# Altium PCB ESP32S3-9INCHES_DISPLAY.PcbDoc (part 1 of 2)
Units mil, origin at the board's own origin, x right, y up, seen from the top; angles counter-clockwise.
Board outline 3937 x 3937.01 mil, 2 copper layers (Top Layer, Bottom Layer); 92 components, 77 nets, 369 pads, 540 vias.
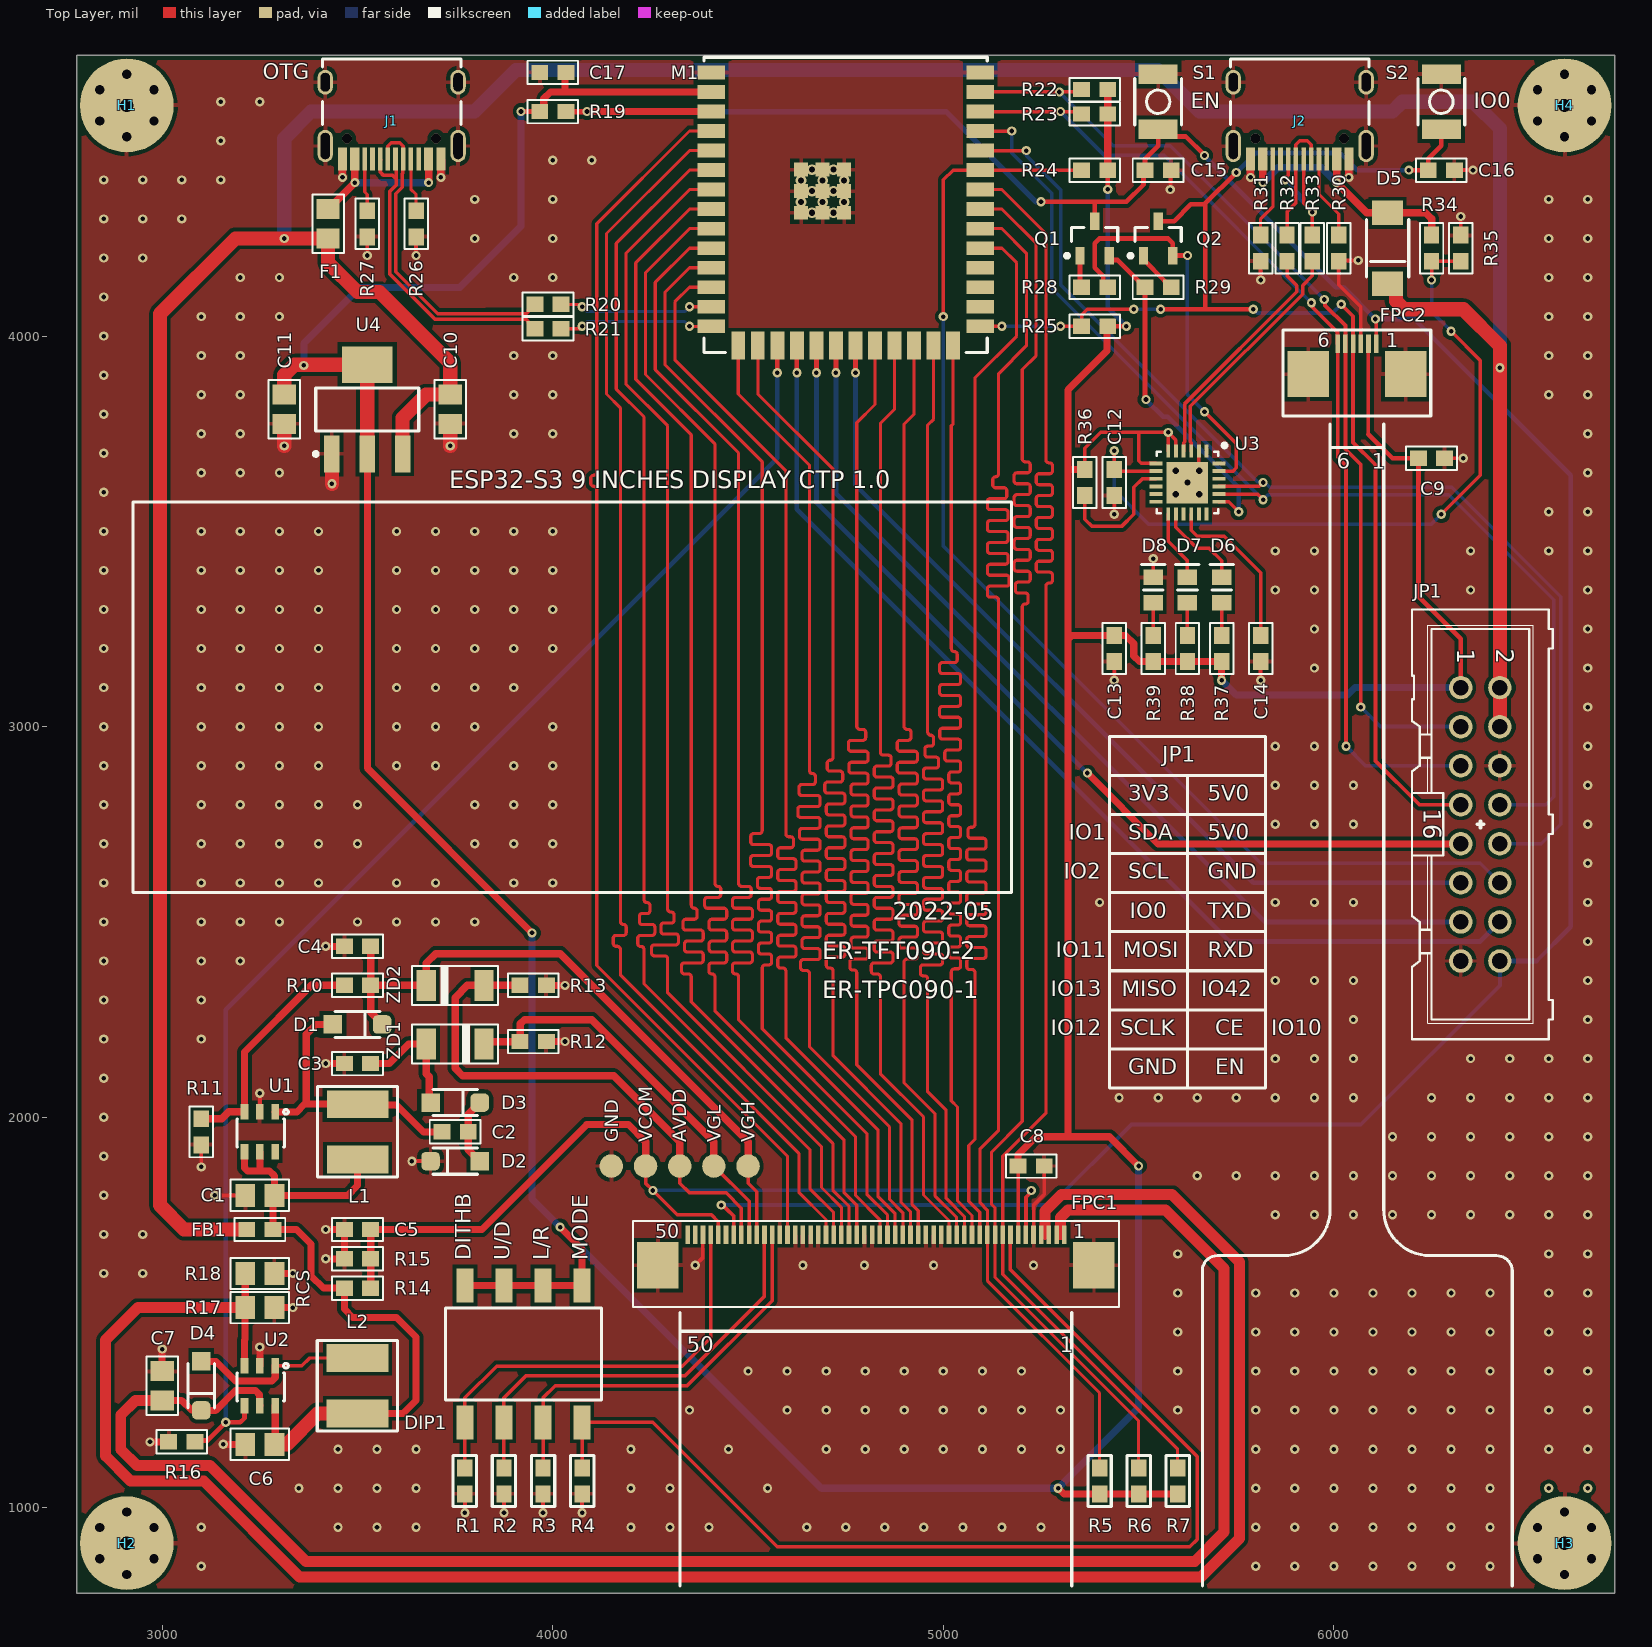
[diagram p0: Top Layer view]
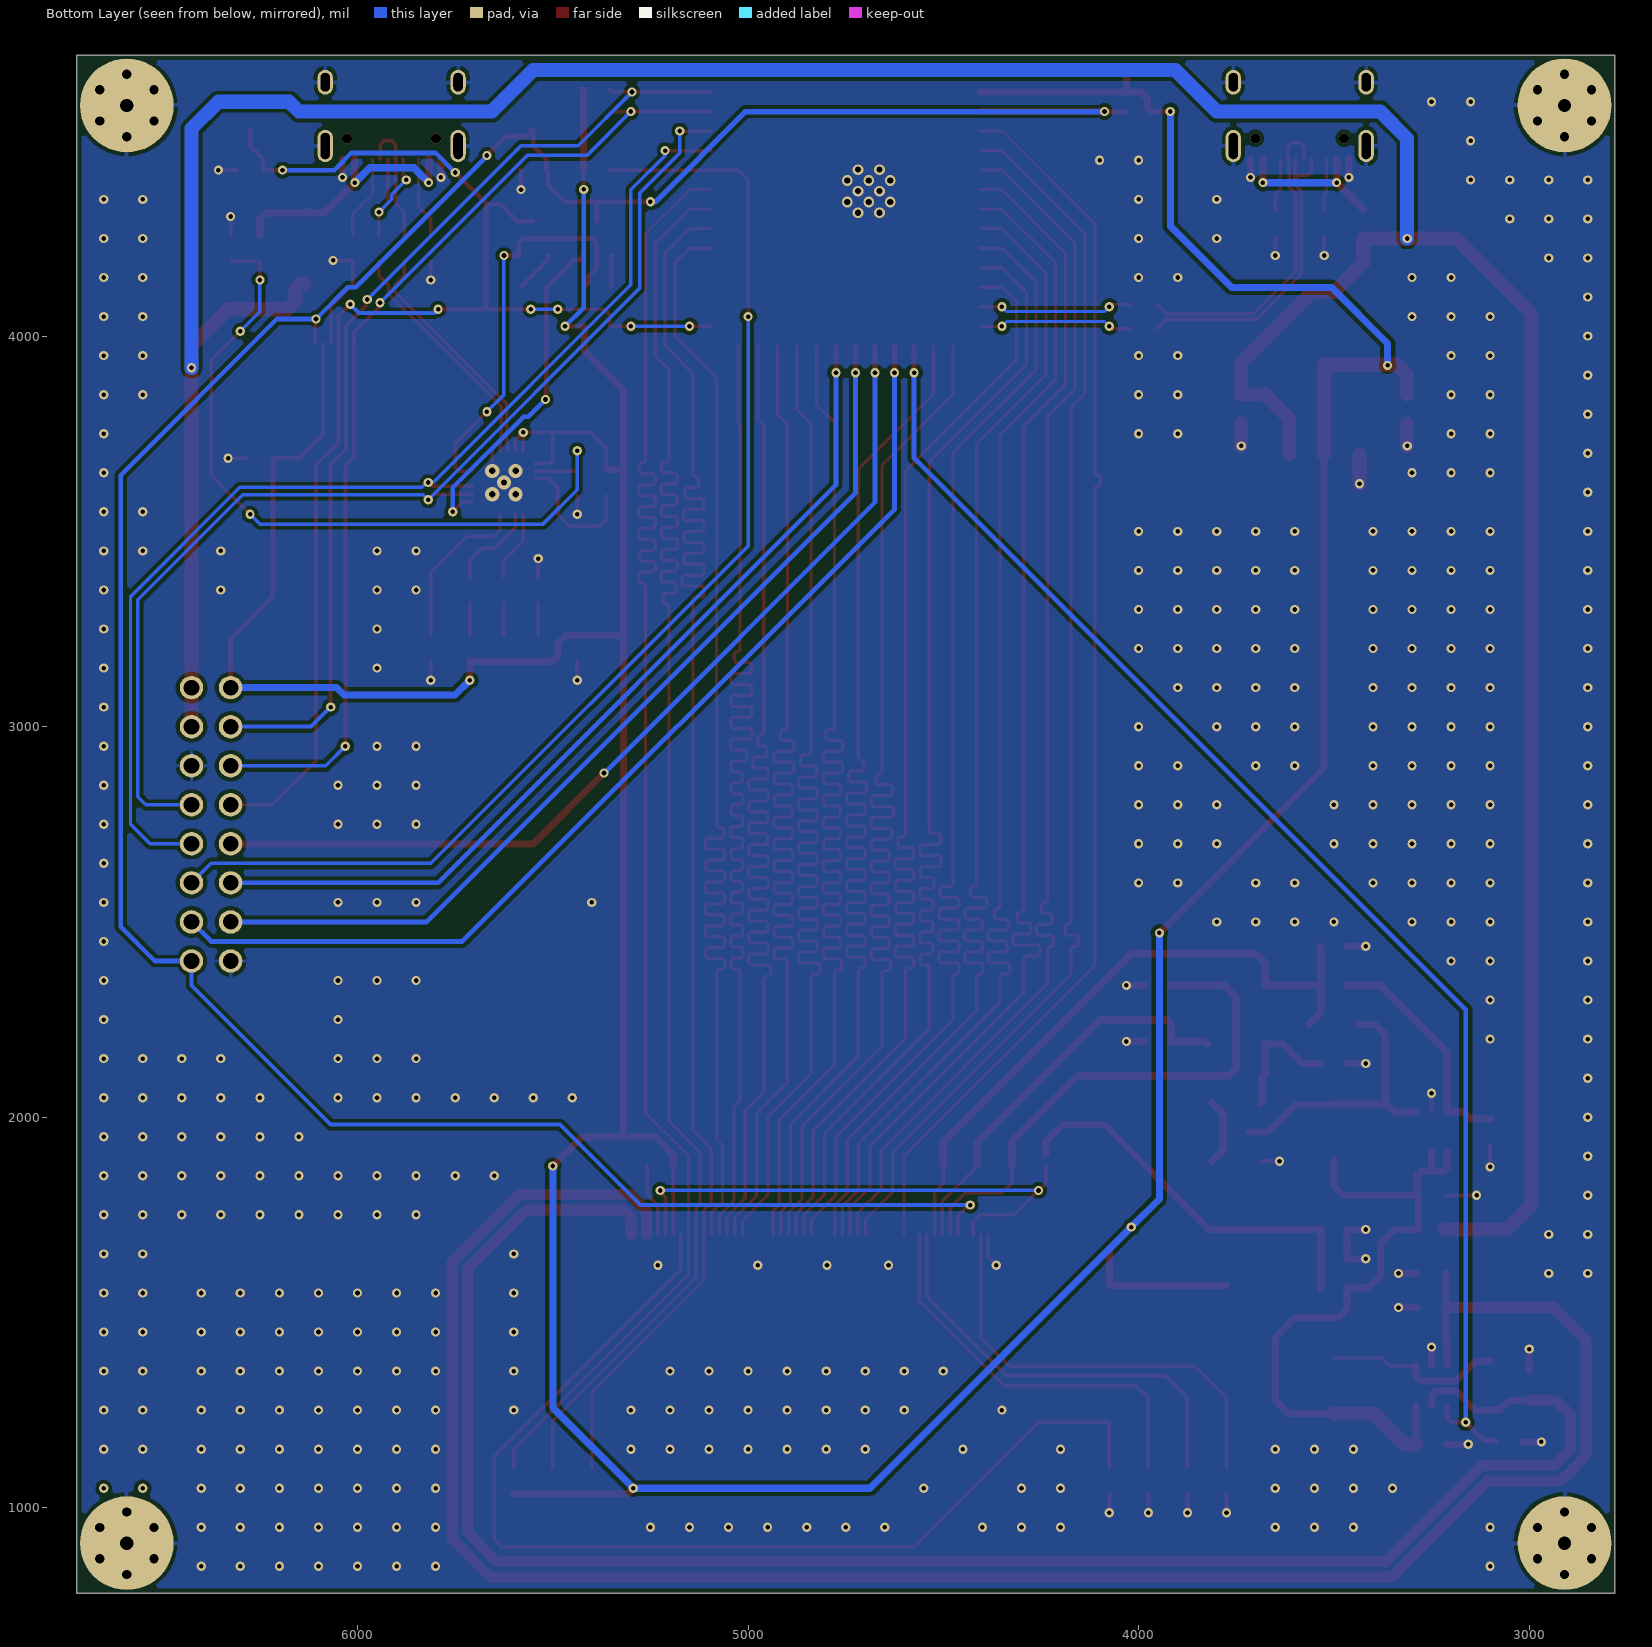
[diagram p1: Bottom Layer view, seen from below]

## Layer stack, top to bottom
Top Solder: solder mask 0.4, Solder Resist, Dk 3.5
Top Layer: signal copper 1.4
Dielectric 1: dielectric 12.6, FR-4, Dk 4.8
Bottom Layer: signal copper 1.4
Bottom Solder: solder mask 0.4, Solder Resist, Dk 3.5

## Board outline
2781.5,781.49 2781.5,4718.51 6718.51,4718.51 6718.51,781.49

## Design rules (kind name [scope] priority, off if disabled: settings)
Clearance [All] p1: gap=10 ignorepadtopadclearanceinfootprint=FALSE except(0: Arc-Hole Track-Hole SMDPad-Hole THPad-Hole Via-Hole Fill-Hole Poly-Hole Region-Hole Text-Hole; 6: Arc-Arc Arc-Track Track-Track; 7.8: Arc-SMDPad Track-SMDPad SMDPad-SMDPad)
DiffPairsRouting [All] p1: maxlimit=6 minlimit=6 mostfreqgap=6 toplayer_minwidth=8.91 toplayer_maxwidth=10.91 toplayer_prefwidth=10.91 bottomlayer_minwidth=8.91 bottomlayer_maxwidth=10.91 bottomlayer_prefwidth=10.91 maxuncoupledlength=500
PolygonConnect PolygonConnectGND [IsTrack Or IsVia] p1: connectstyle=Direct reliefconductorwidth=10 reliefentries=4 polygonreliefangle="90 Angle" airgapwidth=10
PolygonConnect [All] p2: connectstyle=Relief reliefconductorwidth=10 reliefentries=4 polygonreliefangle="90 Angle" airgapwidth=10
RoomDefinition ESP32S3-9INCHES_DISPLAY [InComponentClass('ESP32S3-9INCHES_DISPLAY')] p1: confinementstyle=ConfineOut formatcopy=TRUE lockcomponents=FALSE outline 0,0 500,0 500,500 0,500
RoutingVias [All] p1: holewidth=28 width=50 viastyle="Through Hole" minholewidth=11 minwidth=23 maxholewidth=100 maxwidth=120
SolderMaskExpansion [All] p1: expansion=4 istentingtop=FALSE
Width [All] p1: maxlimit=120 minlimit=6 preferedwidth=10 minimp=50.000000 maximp=50.000000 favimp=50.000000
29 further rules are at their usual default settings.

## Classes and differential pairs
differential pair USB1: +USB1_P -USB1_N
differential pair USBD: +USBD_P -USBD_N

## Components (designator, comment, footprint, x,y, rotation, side; value= is the part's Value field where it differs from the comment)
AVDD "Test Point" MICRO-FIDUCIAL 4325,1875 r90 top
C1 "22uF" 2012[0805] 3250,1800 r0 top
C2 "0.1uF" 1608[0603] 3750,1962.5 r0 top
C3 "1uF" 1608[0603] 3500,2137.5 r0 top
C4 "1uF" 1608[0603] 3500,2437.5 r0 top
C5 "0.1uF" 1608[0603] 3500,1712.5 r0 top
C6 "22uF" 2012[0805] 3250,1162.5 r0 top
C7 "10uF" 2012[0805] 3000,1312.5 r270 top
C8 "0.1uF" 1608[0603] 5225,1875 r180 top
C9 "0.1uF" 1608[0603] 6250,3687.5 r180 top
C10 "10uF" 2012[0805] 3737.5,3812.5 r90 top
C11 "10uF" 2012[0805] 3312.5,3812.5 r90 top
C12 "0.1uF" 1608[0603] 5437.5,3625 r90 top
C13 "4.7uF" 1608[0603] 5437.5,3200 r90 top
C14 "4.7uF" 1608[0603] 5812.5,3200 r90 top
C15 "0.1uF" 1608[0603] 5550,4425 r180 top
C16 "0.1uF" 1608[0603] 6275,4425 r180 top
C17 "0.1uF" 1608[0603] 4000,4675 r0 top
D1 "1N5819W" SOD123FL 3500,2237.5 r0 top
D2 "1N5819W" SOD123FL 3750,1887.5 r180 top
D3 "1N5819W" SOD123FL 3750,2037.5 r0 top
D4 "1N5819W" SOD123FL 3100,1312.5 r270 top
D5 "RB056LAM-40TR" SOD128 6137.5,4225 r270 top
D6 "LED" LED_0603_RED 5712.5,3350 r90 top
D7 "LED" LED_0603_YELLOW 5625,3350 r90 top
D8 "LED" LED_0603_YELLOW 5537.5,3350 r90 top
DIP1 "DSMIC04G-BK-TUBE" DSMIC04G-BK 3925,1393.75 r0 top
F1 "SMD0805-100" 2012[0805] 3425,4287.5 r90 top
FB1 "MPZ2012S101AT" 1608[0603] 3250,1712.5 r180 top
FPC1 "JUSHUO AFC07-S50ECC-00" 68715014022 4827.41,1660 r0 top
FPC2 "JUSHUO AFC07-S06FCA-00" 68710614522 6058.95,3941.52 r0 top
GND "Test Point" MICRO-FIDUCIAL 4150,1875 r90 top
H1 "NUT" "Nut-M3-5 SMT" 2909.45,4590.55 r0 top
H2 "NUT" "Nut-M3-5 SMT" 2909.45,909.45 r0 top
H3 "NUT" "Nut-M3-5 SMT" 6590.55,909.45 r0 top
H4 "NUT" "Nut-M3-5 SMT" 6590.55,4590.55 r0 top
J1 "USB 3.1 C" USB-C-16P 3587.5,4650 r180 top
J2 "USB 3.1 C" USB-C-16P 5912.5,4650 r180 top
JP1 "08x2IDC-H9" 2X08 6375,2750 r270 top
L1 "10uH" INDUCTOR_5X5MM_NR5040_NOTHERMALS 3500.32,1962.5 r90 top value=10mH
L2 "10uH" INDUCTOR_5X5MM_NR5040_NOTHERMALS 3500,1312.5 r90 top value=10mH
M1 "ESP32-S3-WROOM-2" ESP32-S3-WROOM-1 4750,4475 r0 top
Q1 "MMBT2222ALT1G" SOT23N-NPN 5387.5,4250 r90 top
Q2 "MMBT2222ALT1G" SOT23N-NPN 5550,4250 r90 top
R1 "10K" 1608[0603] 3775,1068.75 r90 top
R2 "10K" 1608[0603] 3875,1068.75 r90 top
R3 "10K" 1608[0603] 3975,1068.75 r90 top
R4 "10K" 1608[0603] 4075,1068.75 r90 top
R5 "10K" 1608[0603] 5400,1068.75 r270 top
R6 "10K" 1608[0603] 5500,1068.75 r270 top
R7 "10K" 1608[0603] 5600,1068.75 r270 top
R10 "82K" 1608[0603] 3500,2337.5 r180 top
R11 "4.3K" 1608[0603] 3100,1962.5 r270 top
R12 "10K" 1608[0603] 3950,2193.75 r0 top
R13 "10K" 1608[0603] 3950,2337.5 r0 top
R14 "150" 1608[0603] 3500,1562.5 r0 top
R15 "1.2K" 1608[0603] 3500,1637.5 r180 top
R16 "47K" 1608[0603] 3050,1168.75 r0 top
R17 "1R" 2012[0805] 3250,1512.5 r180 top
R18 "10R" 2012[0805] 3250,1600 r180 top
R19 "10K" 1608[0603] 4000,4575 r180 top
R20 "22" 1608[0603] 3987.5,4081.25 r180 top
R21 "22" 1608[0603] 3987.5,4018.75 r180 top
R22 "10K" 1608[0603] 5387.5,4631.25 r180 top
R23 "10K" 1608[0603] 5387.5,4568.75 r180 top
R24 "10K" 1608[0603] 5387.5,4425 r180 top
R25 "10K" 1608[0603] 5387.5,4025 r180 top
R26 "5.1K" 1608[0603] 3650,4287.5 r90 top
R27 "5.1K" 1608[0603] 3525,4287.5 r270 top
R28 "10K" 1608[0603] 5387.5,4125 r180 top
R29 "10K" 1608[0603] 5550,4125 r0 top
R30 "5.1K" 1608[0603] 6012.5,4225 r90 top
R31 "5.1K" 1608[0603] 5812.5,4225 r270 top
R32 "22" 1608[0603] 5880,4225 r270 top
R33 "22" 1608[0603] 5945,4225 r270 top
R34 "22.1K" 1608[0603] 6250,4225 r270 top
R35 "47.5K" 1608[0603] 6325,4225 r270 top
R36 "4.7K" 1608[0603] 5362.5,3625 r90 top
R37 "1K" 1608[0603] 5712.5,3200 r270 top
R38 "1K" 1608[0603] 5625,3200 r270 top
R39 "1K" 1608[0603] 5537.5,3200 r270 top
S1 "B3U-1000P" SW2-SMD-3.0X2.5X1.2+0.4MM 5550,4600 r90 top
S2 "B3U-1000P" SW2-SMD-3.0X2.5X1.2+0.4MM 6275,4600 r90 top
U1 "MT3608" SOT23-6 3250,1962.5 r270 top
U2 "MT9284BS6" SOT23-6 3250,1312.5 r270 top
U3 "CP2102N" QFN24_4X4 5625,3625 r270 top value=Value
U4 "TLV1117LV33" MP04A_N 3525,3812.5 r90 top
VCOM "Test Point" MICRO-FIDUCIAL 4237.5,1875 r90 top
VGH "Test Point" MICRO-FIDUCIAL 4500,1875 r90 top
VGL "Test Point" MICRO-FIDUCIAL 4412.5,1875 r90 top
ZD1 "12.0V" SOD80 3750,2187.5 r180 top
ZD2 "6.25V" SOD80 3750,2337.5 r0 top

## Footprints (in the part's own frame and the unit in brackets; to place one, negate y for a bottom-side part, rotate by r counter-clockwise, add the part's x,y. Pads: shape width x height; smd on the part's side, far side on the other; paste and mask are expansions set on the pad)
2X08 [mil] "2X08"
  round 60 hole 40: 1(-350,-50) 2(-350,50) 3(-250,-50) 4(-250,50) 5(-150,-50) 6(-150,50) 7(-50,-50) 8(-50,50) 9(50,-50) 10(50,50) 11(150,-50) 12(150,50) 13(250,-50) 14(250,50) 15(350,-50) 16(350,50)
  silkscreen extent -550,-175 550,185, body extent -475,-179 475,190, height 365
1608[0603] [mm] "Chip Resistor; Body 1.6 x 0.8 mm (LxW typ)"
  rect 1.1x1 smd: 1(-0.85,0) 2(0.85,0)
  silkscreen extent -1.65,-0.76 1.65,0.76, body extent -0.87,-0.48 0.87,0.48, height 0.85
2012[0805] [mm] "Chip Resistor; Body 2.0 x 1.3 mm (LxW typ)"
  rect 1.3x1.5 smd: 1(-0.95,0) 2(0.95,0)
  silkscreen extent -1.91,-1.02 1.91,1.02, body extent -1.07,-0.7 1.07,0.7, height 0.7
68710614522 [mm] "06 pins"
  rect 0.3x1.2 smd: 1(1.25,0.99) 2(0.75,0.99) 3(0.25,0.99) 4(-0.25,0.99) 5(-0.75,0.99) 6(-1.25,0.99)
  rect 2.7x3 smd: Z1(3.18,-0.99) Z2(-3.18,-0.99)
  silkscreen extent -4.8,-3.71 4.8,1.89, body extent -4.7,-3.71 4.7,1.39, height 2.06
68715014022 [mm] "50 pins"
  rect 0.3x1.2 smd: 1(12.25,0.99) 2(11.75,0.99) 3(11.25,0.99) 4(10.75,0.99) 5(10.25,0.99) 6(9.75,0.99) 7(9.25,0.99) 8(8.75,0.99) 9(8.25,0.99) 10(7.75,0.99) 11(7.25,0.99) 12(6.75,0.99) 13(6.25,0.99) 14(5.75,0.99) 15(5.25,0.99) 16(4.75,0.99) 17(4.25,0.99) 18(3.75,0.99) 19(3.25,0.99) 20(2.75,0.99) 21(2.25,0.99) 22(1.75,0.99) 23(1.25,0.99) 24(0.75,0.99) 25(0.25,0.99) 26(-0.25,0.99) 27(-0.75,0.99) 28(-1.25,0.99) 29(-1.75,0.99) 30(-2.25,0.99) 31(-2.75,0.99) 32(-3.25,0.99) 33(-3.75,0.99) 34(-4.25,0.99) 35(-4.75,0.99) 36(-5.25,0.99) 37(-5.75,0.99) 38(-6.25,0.99) 39(-6.75,0.99) 40(-7.25,0.99) 41(-7.75,0.99) 42(-8.25,0.99) 43(-8.75,0.99) 44(-9.25,0.99) 45(-9.75,0.99) 46(-10.25,0.99) 47(-10.75,0.99) 48(-11.25,0.99) 49(-11.75,0.99) 50(-12.25,0.99)
  rect 2.7x3 smd: Z1(14.18,-0.99) Z2(-14.18,-0.99)
  silkscreen extent -15.8,-3.71 15.8,1.89, body extent -15.7,-3.71 15.7,1.39, height 2.06
DSMIC04G-BK [mm] "Dip Switch SPST SMT Type,4 Position,Pitch 2.54mm."
  rect 1.1x2.2 smd: 1(-3.81,-4.445) 2(-1.27,-4.445) 3(1.27,-4.445) 4(3.81,-4.445) 5(3.81,4.445) 6(1.27,4.445) 7(-1.27,4.445) 8(-3.81,4.445)
  silkscreen extent -5.08,-3 5.08,3, body extent -5.55,-4.9 5.55,4.9, height 4.36
ESP32-S3-WROOM-1 [mm] "ESP32-S3-WROOM-1[U]"
  rect 1.8x0.9 smd: 1(-8.75,5.08) 2(-8.75,3.81) 3(-8.75,2.54) 4(-8.75,1.27) 5(-8.75,0) 6(-8.75,-1.27) 7(-8.75,-2.54) 8(-8.75,-3.81) 9(-8.75,-5.08) 10(-8.75,-6.35) 11(-8.75,-7.62) 12(-8.75,-8.89) 13(-8.75,-10.16) 14(-8.75,-11.43) 27(8.75,-11.43) 28(8.75,-10.16) 29(8.75,-8.89) 30(8.75,-7.62) 31(8.75,-6.35) 32(8.75,-5.08) 33(8.75,-3.81) 34(8.75,-2.54) 35(8.75,-1.27) 36(8.75,0) 37(8.75,1.27) 38(8.75,2.54) 39(8.75,3.81) 40(8.75,5.08)
  rect 0.9x1.8 smd: 15(-6.985,-12.68) 16(-5.715,-12.68) 17(-4.445,-12.68) 18(-3.175,-12.68) 19(-1.905,-12.68) 20(-0.635,-12.68) 21(0.635,-12.68) 22(1.905,-12.68) 23(3.175,-12.68) 24(4.445,-12.68) 25(5.715,-12.68) 26(6.985,-12.68)
  rect 0.9x0.9 smd: 41(-2.9,-4.04) 41(-2.9,-2.64) 41(-2.9,-1.24) 41(-1.5,-4.04) 41(-1.5,-2.64) 41(-1.5,-1.24) 41(-0.1,-4.04) 41(-0.1,-2.64) 41(-0.1,-1.24)
  silkscreen extent -9.2,-13.13 9.2,6.07, body extent -9.01,-12.93 9.01,12.57, height 3.11
INDUCTOR_5X5MM_NR5040_NOTHERMALS [mil] "INDUCTOR_5X5MM_NR5040_NOTHERMALS"
  rect 71x158 smd: 1(-70.87,0) 2(71,0)
  silkscreen extent -116,-102 116,103, body extent -98,-98 99,100, height 60
LED_0603_RED [mil]
  rect 40x50 smd: 1(-32.5,0) 2(32.5,0)
  silkscreen extent 0,-30 65,30, body extent -32,-16 32,16, height 26
LED_0603_YELLOW [mil]
  rect 40x50 smd: 1(-32.5,0) 2(32.5,0)
  silkscreen extent 0,-30 65,30, body extent -31,-16 32,16, height 26
MICRO-FIDUCIAL [mil] "MICRO-FIDUCIAL"
  rrect100% 60x60 smd: 1(0,0)
MP04A_N [mm] "SOT223, 4-Leads, Body 6.5x3.5mm, Pitch 2.3mm, Lead Span 7mm, IPC Medium Density"
  rect 2.4x1 smd: 1(-2.9,2.3) 2(-2.9,0) 3(-2.9,-2.3)
  rect 2.4x3.3 smd: 4(2.9,0)
  silkscreen extent -3.02,-3.35 1.4,3.47, body extent -1.85,-3.35 1.85,3.35, height 1.8
"Nut-M3-5 SMT" [mil] "M3 latï¿½n standoff spacer 5 mm."
  round 240 hole 34 mask+4: 0(0,0)
  body extent -118,-118 118,118, height 201
QFN24_4X4 [mm]
  rect 0.85x0.25 smd mask+0.127: 1(-2.05,1.25) 2(-2.05,0.75) 3(-2.05,0.25) 4(-2.05,-0.25) 5(-2.05,-0.75) 6(-2.05,-1.25) 13(2.05,-1.25) 14(2.05,-0.75) 15(2.05,-0.25) 16(2.05,0.25) 17(2.05,0.75) 18(2.05,1.25)
  rect 0.25x0.85 smd mask+0.127: 7(-1.25,-2.05) 8(-0.75,-2.05) 9(-0.25,-2.05) 10(0.25,-2.05) 11(0.75,-2.05) 12(1.25,-2.05) 19(1.25,2.05) 20(0.75,2.05) 21(0.25,2.05) 22(-0.25,2.05) 23(-0.75,2.05) 24(-1.25,2.05)
  rect 2.7x2.7 smd mask+0.102: 25(0,0)
  silkscreen extent -2.54,-1.99 1.99,2.54, body extent -2,-2 1.99,2, height 1.8
SOD80 [mm]
  rect 1.25x2 smd: 1(1.875,0) 2(-1.875,0)
  silkscreen extent -2.79,-1.27 2.79,1.27, body extent -1.85,-0.8 1.85,0.8, height 1.57
SOD123FL [mm] "SOD-123; 2 Leads; Body 2.7 x 1.6 mm, (LxW)"
  rect 1.2x1.2 smd: 1(-1.6,0)
  rrect50% 1.2x1.2 smd: 2(1.6,0)
  silkscreen extent -1.45,-0.85 1.45,0.85, body extent -1.45,-0.85 1.45,0.85, height 0.73
SOD128 [mm] "SOD-128; 2 Leads; Body 3.7 x 2.5 mm, (LxW)"
  rect 1.6x2 smd: 1(-2.3,0) 2(2.3,0)
  silkscreen extent -1.88,-1.38 1.88,1.38, body extent -1.85,-1.25 1.85,1.25, height 0.73
SOT23-6 [mm]
  rect 1x0.5 smd: 1(-1.3,1) 2(-1.3,0) 3(-1.3,-1) 4(1.3,-1) 5(1.3,0) 6(1.3,1)
  silkscreen extent -1.45,-1.5 0.97,1.85, body extent -1.5,-1.52 1.5,1.48, height 1.3
SOT23N-NPN [mm] "SOT23, 3-Leads, Body 2.9x1.3mm, Pitch 0.95mm, Lead Span 2.3mm, IPC Medium Density"
  rect 1.15x0.6 smd: 1(-1.125,0.95) 2(-1.125,-0.95) 3(1.125,0)
  silkscreen extent -1.25,-1.5 0.7,1.92, body extent -0.7,-1.5 0.7,1.5, height 1.12
SW2-SMD-3.0X2.5X1.2+0.4MM [mil] "SW2-SMD-3.0X2.5X1.2+0.4MM"
  rect 50x100 smd: 1(-70,0) 2(70,0)
  silkscreen extent -60,-60 60,60
USB-C-16P [mm] "USB 3.1 Type C Female"
  rect 0.3x1.5 smd: A1(-3.35,5.002) A4(-2.55,5.002) A5(-1.25,5.002) A6(-0.25,5.002) A7(0.25,5.002) A8(1.25,5.002) A9(2.55,5.002) A12(3.35,5.002) B1(3.05,5.002) B4(2.25,5.002) B5(1.75,5.002) B6(0.75,5.002) B7(-0.75,5.002) B8(-1.75,5.002) B9(-2.25,5.002) B12(-3.05,5.002)
  oval 1x1.6 hole 0.6 slot 1.2 at 90 deg: S1(-4.32,0) S2(4.32,0)
  oval 1x2.1 hole 0.6 slot 1.7 at 90 deg: S3(4.32,4.15) S4(-4.32,4.15)
  silkscreen extent -4.5,-1.5 4.5,2.75, body extent -4.48,-2.6 4.47,5.3, height 3.16

## Part data
AVDD GND VCOM VGH VGL: "Fiducial Alignment PointsVarious fiducial points for machine vision alignment."
C1 C2 C3 C4 C5 C6 C7 C8 C9 C10 C11 C12 C13 C14 C15 C16 C17: library part Cap, "Capacitor"
D1 D2 D3 D4: "40V 1A 600mV @ 1A SOD-123F Schottky Barrier Diodes (SBD) RoHS"
D5: library part Diode, "Default Diode"
D6 D7 D8: "Typical INFRARED GaAs LED", LatestRevisionDate=08-Jul-2005, LatestRevisionNote="Mech Layer 1 removed.", PackageReference=LED-0, Published=8-Jun-2000, Publisher="Altium Limited"
DIP1: library part "DIP SWITCH 4 POS", "Dip Switch SPST SMT Type,4 Position,Pitch 2.54mm.", ES P/N=0007-1436-4, Link=https://www.es.co.th/detail.asp?Prod=000714364, Product P/N=DSMIC04G-BK-TUBE
F1: library part MPZ2012S101AT, "Ferrite Beads & Chip for EMI", Code_IPC=RESC2012, LatestRevisionDate=29-May-2009, LatestRevisionNote="IPC-7351 Footprint Added.", PackageDescription="Chip Resistor 0805 Case Size", PackageReference=6-0805, PackageVersion=Mar-2003, Published=24-Mar-1999, Publisher="Altium Limited"
FB1: library part MMZ1608B301C, "MMZ1608B301C", Code_IPC=RESC2012, LatestRevisionDate=29-May-2009, LatestRevisionNote="IPC-7351 Footprint Added.", PackageDescription="Chip Resistor 0805 Case Size", PackageReference=6-0805, PackageVersion=Mar-2003, Published=24-Mar-1999, Publisher="Altium Limited"
FPC1: library part "WE-ZIF Connector WR-FPC 68715014022", "WR-FPC 0.50mm SMT ZIF Horizontal Top Contact", Manufacturer="Wจนrth Elektronik eiSos GmbH", partNo=68715014022, ComponentLink1 Description=Manufacturer, ComponentLink1URL=http://www.we-online.com, ComponentLink2 Description=Datasheet, ComponentLink2URL=http://katalog.we-online.de/em/datasheet/6871xx14022.pdf, Created by="Karrer Zheng", Created Date="21 October 2013", NoPins=50
FPC2: library part "WE-ZIF Connector WR-FPC 68710614522", "WR-FPC 0.50mm SMT ZIF Horizontal Bottom Contact", Manufacturer="W¨¹rth Elektronik eiSos GmbH", partNo=68710614522, ComponentLink1 Description=Manufacturer, ComponentLink1URL=http://www.we-online.com, ComponentLink2 Description=Datasheet, ComponentLink2URL=http://katalog.we-online.de/em/datasheet/6871xx14522.pdf, Created by="Karrer Zheng", Created Date="28 October 2013", NoPins=06
H1 H2 H3 H4: library part Nut, "Hold"
J1 J2: library part USB-3.1-Type-C, "USB 3.1 Type C"
JP1: library part PINHD-2X08IDC, "IDC Header 16 Pins Male"
L1 L2: library part Inductor, "Inductor", Code_IEC=1005, Code_JEITA=0402, LatestRevisionDate=29-May-2009, LatestRevisionNote="IPC-7351 Footprint Added.", PackageDescription="Chip Inductor", PackageReference=0402-A, Published=8-Jun-2000, Publisher="Altium Limited"
Q1 Q2: "Transistor NPN 40V/0.6A,General purpose", Code_JEDEC=TO-226-AA, LatestRevisionDate=17-Jul-2002, LatestRevisionNote="Re-released for DXP Platform.", PackageDescription="TO, Flat Index; 3 In-Line, Axial Leads; Body Dia. 4.8mm; Leads 0.55 x 0.51 mm (max)", PackageReference=TO-226-AA, Published=8-Jun-2000, Publisher="Altium Limited"
R1 R2 R3 R4 R5 R6 R7 R10 R11 R12 R13 R14 R15 R16 R17 R18 R19 R20 R21 R22 R23 R24 R25 R26 R27 R28 R29 R30 R31 R32 R33 R34 R35 R36 R37 R38 R39: library part Res, "Resistor"
  R1 R2 R3 R4 R5 R6 R7 R10 R11 R12 R13 R14 R15 R16 R17 R18 R19 R20 R21 R22 R23 R24 R25 R26 R27 R28 R29 R30 R31 R32 R33 R34 R35: Code_IPC=RESC2012, LatestRevisionDate=29-May-2009, LatestRevisionNote="IPC-7351 Footprint Added.", PackageDescription="Chip Resistor 0805 Case Size", PackageReference=6-0805, PackageVersion=Mar-2003, Published=24-Mar-1999, Publisher="Altium Limited"
S1 S2: library part "Tact SW", "SMD-BUTTON-WITHOUT-BOSS-(2P-3X2.5MM)"
U1: "Step-Up Positive Adjustable 1 1.2MHz SOT-23-6 DC-DC Converters RoHS"
U2: library part MT9284, "SOT-23-6 LED Drivers RoHS"
U3: "SINGLE-CHIP USB-TO-UART BRIDGE", RefDes=RefDes, Type=Type
U4: library part LD1117AS33TR, "1000mA Low-Dropout Linear Regulator, 4-pin SOT-223", Manufacturer="National Semiconductor", PackageTopMarking=XYTT*N05B, PartNumber=LM1117IMP-3.3, PowerWise=N, Supplier Part Number 1=7614123, Code_IPC=SOT223-4, Code_JEDEC=TO-261-AA, ComponentLink1Description="LM1117 Datasheet", ComponentLink1URL=http://www.national.com/ds/LM/LM1117.pdf, ComponentLink2Description="LM1117 Web Page", ComponentLink2URL=http://www.national.com/pf/LM/LM1117.html, ComponentLink3Description="MP04A Package Page", ComponentLink3URL=http://www.national.com/packaging/folders/mp04a.html, CompType="LDO IC", DatasheetVersion=Apr-2006, PackageDescription="Molded SOT-223, 6.50 x 3.56 x 1.6mm Body, 4 Lead, 2.3mm Pitch", PackageReference=MP04A, PackageVersion="revB, Apr-2003", PinCount=4, Published=4-Dec-2008, Publisher="Altium Limited", RoHS=N, Supplier 1=Farnell
ZD1 ZD2: library part Zener, "Zener Diode"

## Via types
v1: diameter 23.62, hole 11.81, Top Layer to Bottom Layer, tented both sides, 487 vias
v2: diameter 39.37, hole 23.62, Top Layer to Bottom Layer, 24 vias
v3: diameter 27.56, hole 15.75, Top Layer to Bottom Layer, tented bottom, 12 vias
v4: diameter 23, hole 11.81, Top Layer to Bottom Layer, tented both sides, 8 vias
v5: diameter 36, hole 16, Top Layer to Bottom Layer, tented both sides, 5 vias
v6: diameter 25.59, hole 25.59, Top Layer to Bottom Layer, 4 vias

## Nets (pads, with @x,y where several pads share a name; then routed paths per layer and width w, separated by ;. In a path a pad name is that pad's centre, name@x,y a point inside that pad or via, vN(x,y) a via of type N, cw(c..) or ccw(c..) an arc to the next point about the centre after c; other vN are vias at no path point)
3V3P: C8.2 C9.2 C11.2 C13.2 C17.2 DIP1.5 DIP1.6 DIP1.7 DIP1.8 FPC1.7 FPC2.2 JP1.1 M1.2 R5.2 R6.2 R7.2 R19.2 R22.1 R23.1 R24.1 R25.1 R36.2 R37.2 R38.2 R39.2 U3.5 U3.6 U3.7 U4.2 U4.4 | length 13588.6
  Top Layer w8.91: C8.2@5191.54,1875 5191.58,1874.96 FPC1.7@5191.58,1698.97 ; 5318.75,3656.25 5320.96,3658.46 ; R36.2@5362.5,3658.46 5362.5,3712.5 5403.49,3753.49 5500,3753.49 ; U3.7@5544.29,3674.21 5507.04,3674.21 5500,3681.25 5500,3753.49 ; U3.5@5595.47,3705.71 5595.47,3733.81 v1(5575.79,3753.49) 5500,3753.49
  Top Layer w9: 6088.47,3749.03 FPC2.2@6088.47,3980.49
  Top Layer w10: U3.6@5575.79,3705.71 v1(5575.79,3753.49)
  Top Layer w12: v1(3918.75,4575) R19.2@3966.54,4575 ; R25.1@5418.75,4022.79 R25.1@5420.96,4025 v1(5468.75,4025) ; v1(5420.96,4375.54) R24.1@5420.96,4425 ; 6088.47,3749.03 6150,3687.5 C9.2@6216.54,3687.5 6216.54,3333.46 6325,3225 JP1.1@6325,3100
  Top Layer w18: U4.2@3525,3698.33 3525,2893.75 v1(3946.88,2471.88) ; DIP1.8@3775,1568.75 DIP1.7@3875,1568.75 DIP1.6@3975,1568.75 DIP1.5@4075,1568.75 4075,1662.5 v1(4018.75,1718.75) ; R19.2@3966.54,4575 3976.9,4585.37 3976.9,4608.15 3993.75,4625 4031.25,4625 ; C17.2@4033.46,4675 4031.25,4672.79 4031.25,4625 ; M1.2@4405.51,4625 4031.25,4625 ; C8.2@5191.54,1875 5191.54,1904.04 5237.5,1950 5318.75,1950 ; v1(5293.75,1050) 5308.46,1035.29 R5.2@5400,1035.29 R6.2@5500,1035.29 R7.2@5600,1035.29 ; 5320.96,3658.46 R36.2@5362.5,3658.46 ; R25.1@5418.75,4022.79 5418.75,3962.5 5318.75,3862.5 5318.75,3656.25 5318.75,3222.92 ; R24.1@5420.96,4425 R23.1@5420.96,4568.75 R22.1@5420.96,4631.25 ; v1(5500,1875) 5425,1950 5318.75,1950 ; v1(5712.5,3118.75) R37.2@5712.5,3166.54 R38.2@5625,3166.54 R39.2@5537.5,3166.54 5502.21,3166.54 5487.5,3181.25 5487.5,3212.5 5466.54,3233.46 C13.2@5437.5,3233.46 5329.29,3233.46 5318.75,3222.92 ; 5318.75,1950 5318.75,3222.92
  Top Layer w36: C11.2@3312.5,3849.9 3312.5,3900 3339.17,3926.67 U4.4@3525,3926.67 U4.2@3525,3698.33
  Bottom Layer w12: v1(5420.96,4375.54) 5420.96,4072.79 v1(5468.75,4025)
  Bottom Layer w18: v1(3362.5,3925) 3362.5,3981.25 3506.25,4125 3762.5,4125 3918.75,4281.25 v1(3918.75,4575) ; v1(3946.88,2471.88) 3946.88,1790.62 v1(4018.75,1718.75) 4687.5,1050 v1(5293.75,1050) 5500,1256.25 v1(5500,1875) ; v1(5712.5,3118.75) 5750,3081.25 6034.94,3081.25 6053.69,3100 JP1.1@6325,3100
5V0A: C1.2 C6.2 FB1.1 L1.1 L2.1 R14.1 U1.4 U1.5 U2.6 | length 1833.2
  Top Layer w8.91: 3246.88,1862.5 3250,1865.62
  Top Layer w18: U1.4@3210.63,1911.32 3210.63,1870.62 3218.75,1862.5 3246.88,1862.5 3275,1862.5 3287.5,1850 3287.5,1800.1 C1.2@3287.4,1800 ; 3250,1865.62 U1.5@3250,1911.32 ; C6.2@3289.37,1162.5 U2.6@3289.37,1261.32 ; L2.1@3500,1241.63 3616.63,1241.63 3650,1275 3650,1437.5 3600,1487.5 3487.5,1487.5 3466.54,1508.46 R14.1@3466.54,1562.5 3412.5,1562.5 3381.25,1593.75 3381.25,1675 3343.75,1712.5 FB1.1@3283.46,1712.5 3283.46,1796.06 C1.2@3287.4,1800 ; L1.1@3500,1891.63 3500,1825 3475,1800 C1.2@3287.4,1800
  Top Layer w36: C6.2@3289.37,1162.5 3318.75,1162.5 3397.88,1241.63 L2.1@3500,1241.63
5V0P: C10.2 D5.2 F1.1 FB1.2 JP1.2 JP1.4 U4.3 | length 9326.2
  Top Layer w36: FB1.2@3216.54,1712.5 3056.25,1712.5 2993.75,1775 2993.75,4056.25 3187.6,4250.1 F1.1@3425,4250.1 3425,4187.5 3500,4112.5 3556.25,4112.5 3737.5,3931.25 C10.2@3737.5,3849.9 3674.9,3849.9 3615.55,3790.55 U4.3@3615.55,3698.33 ; D5.2@6137.5,4134.45 6145.37,4134.45 6158.87,4120.95 6158.87,4089.84 6179.96,4068.75 6331.25,4068.75 6425,3975 JP1.2@6425,3100 JP1.4@6425,3000
  Bottom Layer w36: v1(3312.5,4250) 3312.5,4506.25 3381.25,4575 3800,4575 3906.25,4681.25 5550,4681.25 5656.25,4575 6150,4575 6175,4600 6356.25,4600 6425,4531.25 v1(6425,3918.75)
AVDD: AVDD.1 FPC1.43 R13.1 ZD2.1 | length 1372.2
  Top Layer w8.91: AVDD.1@4325,1875 4325,1831.25 4350,1806.25 4443.75,1806.25 4482.92,1767.08 FPC1.43@4482.92,1698.97
  Top Layer w19: R13.1@3916.54,2337.5 ZD2.1@3823.82,2337.5 3781.25,2337.5 3750,2306.25 3750,2125 3768.75,2106.25 4156.25,2106.25 4325,1937.5 AVDD.1@4325,1875
D0: FPC1.32 M1.5 | length 3200
  Top Layer w8: M1.5@4405.51,4475 4350,4475 4137.5,4262.5 4137.5,3851.71 4173.03,3816.18 4173.03,3777.3 4173.03,3687.5 4173.03,2501.62 ccw(c4181.03,2501.62) 4181.03,2493.62 cw(c4181.03,2486.62) 4188.03,2486.62 4188.03,2472.62 cw(c4181.03,2472.62) 4181.03,2465.62 4161.75,2465.62 ccw(c4161.75,2458.62) 4154.75,2458.62 4154.75,2444.62 ccw(c4161.75,2444.62) 4161.75,2437.62 4165.03,2437.62 cw(c4165.03,2429.62) 4173.03,2429.62 4173.03,2425.62 4173.03,2364.47 4630.05,1907.45 4630.05,1807.45 4699.46,1738.04 FPC1.32@4699.46,1698.97
D1: FPC1.31 M1.6 | length 3200
  Top Layer w8: M1.6@4405.51,4425 4350,4425 4162.5,4237.5 4162.5,3864.21 4233.55,3793.16 4233.55,3687.5 4233.55,3683.5 4233.55,2557.48 ccw(c4241.55,2557.48) 4241.55,2549.48 cw(c4241.55,2542.48) 4248.55,2542.48 4248.55,2528.48 cw(c4241.55,2528.48) 4241.55,2521.48 4228.71,2521.48 ccw(c4228.71,2514.48) 4221.71,2514.48 4221.71,2500.48 ccw(c4228.71,2500.48) 4228.71,2493.48 4254.25,2493.48 cw(c4254.25,2486.48) 4261.25,2486.48 4261.25,2472.48 cw(c4254.25,2472.48) 4254.25,2465.48 4224.52,2465.48 ccw(c4224.52,2458.48) 4217.52,2458.48 4217.52,2444.48 ccw(c4224.52,2444.48) 4224.52,2437.48 4225.55,2437.48 cw(c4225.55,2429.48) 4233.55,2429.48 4233.55,2425.48 4233.55,2341.45 4659.06,1915.94 4659.06,1815.94 4719.14,1755.86 FPC1.31@4719.14,1698.97
D2: FPC1.30 M1.7 | length 3200
  Top Layer w8: M1.7@4405.51,4375 4350,4375 4187.5,4212.5 4187.5,3876.71 4294.08,3770.13 4294.08,3688.08 4294.08,3685 4294.08,3684.08 4294.08,2533.2 ccw(c4302.08,2533.2) 4302.08,2525.2 4303.29,2525.2 cw(c4303.29,2518.2) 4310.29,2518.2 4310.29,2504.2 cw(c4303.29,2504.2) 4303.29,2497.2 4284.05,2497.2 ccw(c4284.05,2490.2) 4277.05,2490.2 4277.05,2476.2 ccw(c4284.05,2476.2) 4284.05,2469.2 4314.51,2469.2 cw(c4314.51,2462.2) 4321.51,2462.2 4321.51,2448.2 cw(c4314.51,2448.2) 4314.51,2441.2 4259.9,2441.2 ccw(c4259.9,2434.2) 4252.9,2434.2 4252.9,2420.2 ccw(c4259.9,2420.2) 4259.9,2413.2 4286.08,2413.2 cw(c4286.08,2405.2) 4294.08,2405.2 4294.08,2401.2 4294.08,2318.42 4688.07,1924.43 4688.07,1819.9 4738.83,1769.14 FPC1.30@4738.83,1698.97
D3: FPC1.29 M1.8 | length 3200
  Top Layer w8: M1.8@4405.51,4325 4350,4325 4212.5,4187.5 4212.5,3889.21 4354.6,3747.11 4354.6,3687.69 4354.6,3683.69 4354.6,2543 ccw(c4362.6,2543) 4362.6,2535 cw(c4362.61,2528) 4369.61,2528 4369.61,2514 cw(c4362.61,2514) 4362.61,2507 4340.72,2507 ccw(c4340.72,2500) 4333.72,2500 4333.72,2486 ccw(c4340.72,2486) 4340.72,2479 4378.14,2479 cw(c4378.14,2472) 4385.14,2472 4385.14,2458 cw(c4378.14,2458) 4378.14,2451 4344.31,2451 ccw(c4344.31,2444) 4337.31,2444 4337.31,2430 ccw(c4344.31,2430) 4344.31,2423 4378.14,2423 cw(c4378.14,2416) 4385.14,2416 4385.14,2402 cw(c4378.14,2402) 4378.14,2395 4336.73,2395 ccw(c4336.73,2388) 4329.73,2388 4329.73,2374 ccw(c4336.73,2374) 4336.73,2367 4346.6,2367 cw(c4346.6,2359) 4354.6,2359 4354.6,2355 4354.6,2295.4 4717.08,1932.92 4717.08,1813.23 4758.51,1771.8 FPC1.29@4758.51,1698.97
D4: FPC1.28 M1.9 | length 3200
  Top Layer w8: M1.9@4405.51,4275 4350,4275 4237.5,4162.5 4237.5,3901.71 4415.13,3724.08 4415.13,3660 4415.13,3656 4415.13,2599 ccw(c4423.13,2599) 4423.13,2591 cw(c4423.13,2584) 4430.13,2584 4430.13,2570 cw(c4423.13,2570) 4423.13,2563 4395.91,2563 ccw(c4395.91,2556) 4388.91,2556 4388.91,2542 ccw(c4395.91,2542) 4395.91,2535 4438.28,2535 cw(c4438.28,2528) 4445.28,2528 4445.28,2514 cw(c4438.28,2514) 4438.28,2507 4407.4,2507 ccw(c4407.4,2500) 4400.4,2500 4400.4,2486 ccw(c4407.4,2486) 4407.4,2479 4438.28,2479 cw(c4438.28,2472) 4445.28,2472 4445.28,2458 cw(c4438.28,2458) 4438.28,2451 4407.4,2451 ccw(c4407.4,2444) 4400.4,2444 4400.4,2430 ccw(c4407.4,2430) 4407.4,2423 4438.28,2423 cw(c4438.28,2416) 4445.28,2416 4445.28,2402 cw(c4438.28,2402) 4438.28,2395 4406.84,2395 ccw(c4406.84,2388) 4399.84,2388 4399.84,2374 ccw(c4406.84,2374) 4406.84,2367 4407.13,2367 cw(c4407.13,2359) 4415.13,2359 4415.13,2355 4415.13,2272.37 4746.09,1941.41 4746.09,1806.57 4778.2,1774.46 FPC1.28@4778.2,1698.97
D5: FPC1.25 M1.10 | length 3200.1
  Top Layer w8: M1.10@4405.51,4225 4350,4225 4262.5,4137.5 4262.5,3914.21 4475.66,3701.05 4475.66,3655 4475.66,3651 4475.66,2599 ccw(c4483.66,2599) 4483.66,2591 4501.07,2591 cw(c4501.07,2584) 4508.07,2584 4508.07,2570 cw(c4501.07,2570) 4501.07,2563 4467.54,2563 ccw(c4467.54,2556) 4460.54,2556 4460.54,2542 ccw(c4467.54,2542) 4467.54,2535 4504.05,2535 cw(c4504.05,2528) 4511.05,2528 4511.05,2514 cw(c4504.05,2514) 4504.05,2507 4467.54,2507 ccw(c4467.54,2500) 4460.54,2500 4460.54,2486 ccw(c4467.54,2486) 4467.54,2479 4504.05,2479 cw(c4504.05,2472) 4511.05,2472 4511.05,2458 cw(c4504.05,2458) 4504.05,2451 4467.54,2451 ccw(c4467.54,2444) 4460.54,2444 4460.54,2430 ccw(c4467.54,2430) 4467.54,2423 4504.05,2423 cw(c4504.05,2416) 4511.05,2416 4511.05,2402 cw(c4504.05,2402) 4504.05,2395 4467.11,2395 ccw(c4467.11,2388) 4460.11,2388 4460.11,2374 ccw(c4467.11,2374) 4467.11,2367 4467.66,2367 cw(c4467.66,2359) 4475.66,2359 4475.66,2355 4475.66,2249.34 4775.1,1949.9 4775.1,1799.9 4837.5,1737.5 4837.5,1699.23 FPC1.25@4837.25,1698.97
D6: FPC1.24 M1.11 | length 3200
  Top Layer w8: M1.11@4405.51,4175 4350,4175 4287.5,4112.5 4287.5,3926.71 4536.18,3678.03 4536.18,3650 4536.18,3646 4536.18,2734 cw(c4528.18,2734) 4528.18,2726 4513.75,2726 ccw(c4513.75,2719) 4506.75,2719 4506.75,2705 ccw(c4513.75,2705) 4513.75,2698 4553.08,2698 cw(c4553.08,2691) 4560.08,2691 4560.08,2677 cw(c4553.08,2677) 4553.08,2670 4513.46,2670 ccw(c4513.46,2663) 4506.46,2663 4506.46,2649 ccw(c4513.46,2649) 4513.46,2642 4553.08,2642 cw(c4553.08,2635) 4560.08,2635 4560.08,2621 cw(c4553.08,2621) 4553.08,2614 4530.87,2614 ccw(c4530.87,2607) 4523.87,2607 4523.87,2593 ccw(c4530.87,2593) 4530.87,2586 4553.08,2586 cw(c4553.08,2579) 4560.08,2579 4560.08,2565 cw(c4553.08,2565) 4553.08,2558 4533.85,2558 ccw(c4533.85,2551) 4526.85,2551 4526.85,2537 ccw(c4533.85,2537) 4533.85,2530 4553.08,2530 cw(c4553.08,2523) 4560.08,2523 4560.08,2509 cw(c4553.08,2509) 4553.08,2502 4533.85,2502 ccw(c4533.85,2495) 4526.85,2495 4526.85,2481 ccw(c4533.85,2481) 4533.85,2474 4553.08,2474 cw(c4553.08,2467) 4560.08,2467 4560.08,2453 cw(c4553.08,2453) 4553.08,2446 4533.85,2446 ccw(c4533.85,2439) 4526.85,2439 4526.85,2425 ccw(c4533.85,2425) 4533.85,2418 4553.08,2418 cw(c4553.08,2411) 4560.08,2411 4560.08,2397 cw(c4553.08,2397) 4553.08,2390 4544.18,2390 ccw(c4544.18,2382) 4536.18,2382 4536.18,2354 4536.18,2350 4536.18,2226.32 4804.11,1958.39 4804.11,1802.88 4856.94,1750.04 FPC1.24@4856.94,1698.97
D7: FPC1.23 M1.12 | length 3200
  Top Layer w8: M1.12@4405.51,4125 4350,4125 4312.5,4087.5 4312.5,3939.21 4596.71,3655 4596.71,3651 4596.71,2726 ccw(c4604.71,2726) 4604.71,2718 4609.06,2718 cw(c4609.06,2711) 4616.06,2711 4616.06,2697 cw(c4609.06,2697) 4609.06,2690 4582.88,2690 ccw(c4582.88,2683) 4575.88,2683 4575.88,2669 ccw(c4582.88,2669) 4582.88,2662 4615.67,2662 cw(c4615.67,2655) 4622.67,2655 4622.67,2641 cw(c4615.67,2641) 4615.67,2634 4582.88,2634 ccw(c4582.88,2627) 4575.88,2627 4575.88,2613 ccw(c4582.88,2613) 4582.88,2606 4615.67,2606 cw(c4615.67,2599) 4622.67,2599 4622.67,2585 cw(c4615.67,2585) 4615.67,2578 4582.88,2578 ccw(c4582.88,2571) 4575.88,2571 4575.88,2557 ccw(c4582.88,2557) 4582.88,2550 4615.67,2550 cw(c4615.67,2543) 4622.67,2543 4622.67,2529 cw(c4615.67,2529) 4615.67,2522 4582.88,2522 ccw(c4582.88,2515) 4575.88,2515 4575.88,2501 ccw(c4582.88,2501) 4582.88,2494 4615.67,2494 cw(c4615.67,2487) 4622.67,2487 4622.67,2473 cw(c4615.67,2473) 4615.67,2466 4582.88,2466 ccw(c4582.88,2459) 4575.88,2459 4575.88,2445 ccw(c4582.88,2445) 4582.88,2438 4615.67,2438 cw(c4615.67,2431) 4622.67,2431 4622.67,2417 cw(c4615.67,2417) 4615.67,2410 4582.88,2410 ccw(c4582.88,2403) 4575.88,2403 4575.88,2389 ccw(c4582.88,2389) 4582.88,2382 4588.71,2382 cw(c4588.71,2374) 4596.71,2374 4596.71,2370 4596.71,2203.29 4833.11,1966.88 4833.11,1796.21 4876.62,1752.71 FPC1.23@4876.62,1698.97
D8: FPC1.22 M1.15 | length 3200
  Top Layer w8: M1.15@4475,3975.79 4475,3851.71 4657.24,3669.47 4657.24,3645 4657.24,3641 4657.24,2887.69 ccw(c4665.24,2887.69) 4665.24,2879.69 cw(c4665.24,2872.69) 4672.24,2872.69 4672.24,2858.69 cw(c4665.24,2858.69) 4665.24,2851.69 4637.56,2851.69 ccw(c4637.56,2844.69) 4630.56,2844.69 4630.56,2830.69 ccw(c4637.56,2830.69) 4637.56,2823.69 4677.54,2823.69 cw(c4677.54,2816.69) 4684.54,2816.69 4684.54,2802.69 cw(c4677.54,2802.69) 4677.54,2795.69 4634.4,2795.69 ccw(c4634.4,2788.69) 4627.4,2788.69 4627.4,2774.69 ccw(c4634.4,2774.69) 4634.4,2767.69 4677.54,2767.69 cw(c4677.54,2760.69) 4684.54,2760.69 4684.54,2746.69 cw(c4677.54,2746.69) 4677.54,2739.69 4638.86,2739.69 ccw(c4638.86,2732.69) 4631.86,2732.69 4631.86,2718.69 ccw(c4638.86,2718.69) 4638.86,2711.69 4677.54,2711.69 cw(c4677.54,2704.69) 4684.54,2704.69 4684.54,2690.69 cw(c4677.54,2690.69) 4677.54,2683.69 4645.47,2683.69 ccw(c4645.47,2676.69) 4638.47,2676.69 4638.47,2662.69 ccw(c4645.47,2662.69) 4645.47,2655.69 4677.54,2655.69 cw(c4677.54,2648.69) 4684.54,2648.69 4684.54,2634.69 cw(c4677.54,2634.69) 4677.54,2627.69 4645.47,2627.69 ccw(c4645.47,2620.69) 4638.47,2620.69 4638.47,2606.69 ccw(c4645.47,2606.69) 4645.47,2599.69 4677.54,2599.69 cw(c4677.54,2592.69) 4684.54,2592.69 4684.54,2578.69 cw(c4677.54,2578.69) 4677.54,2571.69 4645.47,2571.69 ccw(c4645.47,2564.69) 4638.47,2564.69 4638.47,2550.69 ccw(c4645.47,2550.69) 4645.47,2543.69 4677.54,2543.69 cw(c4677.54,2536.69) 4684.54,2536.69 4684.54,2522.69 cw(c4677.54,2522.69) 4677.54,2515.69 4645.46,2515.69 ccw(c4645.46,2508.69) 4638.46,2508.69 4638.46,2494.69 ccw(c4645.46,2494.69) 4645.46,2487.69 4677.54,2487.69 cw(c4677.54,2480.69) 4684.54,2480.69 4684.54,2466.69 cw(c4677.54,2466.69) 4677.54,2459.69 4645.46,2459.69 ccw(c4645.46,2452.69) 4638.46,2452.69 4638.46,2438.69 ccw(c4645.46,2438.69) 4645.46,2431.69 4677.54,2431.69 cw(c4677.54,2424.69) 4684.54,2424.69 4684.54,2410.69 cw(c4677.54,2410.69) 4677.54,2403.69 4641.55,2403.69 ccw(c4641.55,2396.69) 4634.55,2396.69 4634.55,2382.69 ccw(c4641.55,2382.69) 4641.55,2375.69 4649.24,2375.69 cw(c4649.24,2367.69) 4657.24,2367.69 4657.24,2363.69 4657.24,2180.26 4862.12,1975.38 4862.12,1789.55 4896.31,1755.36 FPC1.22@4896.31,1698.97
D9: FPC1.21 M1.16 | length 3200
  Top Layer w8: M1.16@4525,3975.79 4525,3851.71 4717.76,3658.95 4717.76,3655 4717.76,3651 4717.76,2922 cw(c4709.76,2922) 4709.76,2914 ccw(c4709.76,2907) 4702.76,2907 4702.76,2893 ccw(c4709.76,2893) 4709.76,2886 4735.35,2886 cw(c4735.35,2879) 4742.35,2879 4742.35,2865 cw(c4735.35,2865) 4735.35,2858 4703.27,2858 ccw(c4703.27,2851) 4696.27,2851 4696.27,2837 ccw(c4703.27,2837) 4703.27,2830 4740.84,2830 cw(c4740.84,2823) 4747.84,2823 4747.84,2809 cw(c4740.84,2809) 4740.84,2802 4707.34,2802 ccw(c4707.34,2795) 4700.34,2795 4700.34,2781 ccw(c4707.34,2781) 4707.34,2774 4740.84,2774 cw(c4740.84,2767) 4747.84,2767 4747.84,2753 cw(c4740.84,2753) 4740.84,2746 4707.34,2746 ccw(c4707.34,2739) 4700.34,2739 4700.34,2725 ccw(c4707.34,2725) 4707.34,2718 4740.84,2718 cw(c4740.84,2711) 4747.84,2711 4747.84,2697 cw(c4740.84,2697) 4740.84,2690 4707.34,2690 ccw(c4707.34,2683) 4700.34,2683 4700.34,2669 ccw(c4707.34,2669) 4707.34,2662 4740.84,2662 cw(c4740.84,2655) 4747.84,2655 4747.84,2641 cw(c4740.84,2641) 4740.84,2634 4707.33,2634 ccw(c4707.33,2627) 4700.33,2627 4700.33,2613 ccw(c4707.33,2613) 4707.33,2606 4740.84,2606 cw(c4740.84,2599) 4747.84,2599 4747.84,2585 cw(c4740.84,2585) 4740.84,2578 4707.34,2578 ccw(c4707.34,2571) 4700.34,2571 4700.34,2557 ccw(c4707.34,2557) 4707.34,2550 4740.84,2550 cw(c4740.84,2543) 4747.84,2543 4747.84,2529 cw(c4740.84,2529) 4740.84,2522 4707.34,2522 ccw(c4707.34,2515) 4700.34,2515 4700.34,2501 ccw(c4707.34,2501) 4707.34,2494 4740.84,2494 cw(c4740.84,2487) 4747.84,2487 4747.84,2473 cw(c4740.84,2473) 4740.84,2466 4707.34,2466 ccw(c4707.34,2459) 4700.34,2459 4700.34,2445 ccw(c4707.34,2445) 4707.34,2438 4740.84,2438 cw(c4740.84,2431) 4747.84,2431 4747.84,2417 cw(c4740.84,2417) 4740.84,2410 4707.34,2410 ccw(c4707.34,2403) 4700.34,2403 4700.34,2389 ccw(c4707.34,2389) 4707.34,2382 4709.76,2382 cw(c4709.76,2374) 4717.76,2374 4717.76,2370 4717.76,2157.24 4891.13,1983.87 4891.13,1782.88 4915.99,1758.03 FPC1.21@4915.99,1698.97
D10: FPC1.20 M1.22 | length 3200
  Top Layer w8: M1.22@4825,3975.79 4825,3825 4778.29,3778.29 4778.29,3655 4778.29,3651 4778.29,3001 ccw(c4786.29,3001) 4786.29,2993 4794.17,2993 cw(c4794.17,2986) 4801.17,2986 4801.17,2972 cw(c4794.17,2972) 4794.17,2965 4763.81,2965 ccw(c4763.81,2958) 4756.81,2958 4756.81,2944 ccw(c4763.81,2944) 4763.81,2937 4800.25,2937 cw(c4800.25,2930) 4807.25,2930 4807.25,2916 cw(c4800.25,2916) 4800.25,2909 4765.15,2909 ccw(c4765.15,2902) 4758.15,2902 4758.15,2888 ccw(c4765.15,2888) 4765.15,2881 4800.25,2881 cw(c4800.25,2874) 4807.25,2874 4807.25,2860 cw(c4800.25,2860) 4800.25,2853 4770.64,2853 ccw(c4770.64,2846) 4763.64,2846 4763.64,2832 ccw(c4770.64,2832) 4770.64,2825 4800.25,2825 cw(c4800.25,2818) 4807.25,2818 4807.25,2804 cw(c4800.25,2804) 4800.25,2797 4770.64,2797 ccw(c4770.64,2790) 4763.64,2790 4763.64,2776 ccw(c4770.64,2776) 4770.64,2769 4800.25,2769 cw(c4800.25,2762) 4807.25,2762 4807.25,2748 cw(c4800.25,2748) 4800.25,2741 4770.61,2741 ccw(c4770.61,2734) 4763.61,2734 4763.61,2720 ccw(c4770.61,2720) 4770.61,2713 4800.25,2713 cw(c4800.25,2706) 4807.25,2706 4807.25,2692 cw(c4800.25,2692) 4800.25,2685 4770.64,2685 ccw(c4770.64,2678) 4763.64,2678 4763.64,2664 ccw(c4770.64,2664) 4770.64,2657 4800.25,2657 cw(c4800.25,2650) 4807.25,2650 4807.25,2636 cw(c4800.25,2636) 4800.25,2629 4770.64,2629 ccw(c4770.64,2622) 4763.64,2622 4763.64,2608 ccw(c4770.64,2608) 4770.64,2601 4800.25,2601 cw(c4800.25,2594) 4807.25,2594 4807.25,2580 cw(c4800.25,2580) 4800.25,2573 4770.64,2573 ccw(c4770.64,2566) 4763.64,2566 4763.64,2552 ccw(c4770.64,2552) 4770.64,2545 4800.25,2545 cw(c4800.25,2538) 4807.25,2538 4807.25,2524 cw(c4800.25,2524) 4800.25,2517 4770.64,2517 ccw(c4770.64,2510) 4763.64,2510 4763.64,2496 ccw(c4770.64,2496) 4770.64,2489 4800.25,2489 cw(c4800.25,2482) 4807.25,2482 4807.25,2468 cw(c4800.25,2468) 4800.25,2461 4770.64,2461 ccw(c4770.64,2454) 4763.64,2454 4763.64,2440 ccw(c4770.64,2440) 4770.64,2433 4800.25,2433 cw(c4800.25,2426) 4807.25,2426 4807.25,2412 cw(c4800.25,2412) 4800.25,2405 4767.76,2405 ccw(c4767.76,2398) 4760.76,2398 4760.76,2384 ccw(c4767.76,2384) 4767.76,2377 4770.29,2377 cw(c4770.29,2369) 4778.29,2369 4778.29,2365 4778.29,2134.21 4920.14,1992.36 4920.14,1776.22 4935.68,1760.68 FPC1.20@4935.68,1698.97
D11: FPC1.16 M1.23 | length 3200
  Top Layer w8: M1.23@4875,3975.79 4875,3812.5 4838.82,3776.32 4838.82,3665 4838.82,3661 4838.82,2935 ccw(c4846.82,2935) 4846.82,2927 4859.12,2927 cw(c4859.12,2920) 4866.12,2920 4866.12,2906 cw(c4859.12,2906) 4859.12,2899 4830.05,2899 ccw(c4830.05,2892) 4823.05,2892 4823.05,2878 ccw(c4830.05,2878) 4830.05,2871 4863.9,2871 cw(c4863.9,2864) 4870.9,2864 4870.9,2850 cw(c4863.9,2850) 4863.9,2843 4830.05,2843 ccw(c4830.05,2836) 4823.05,2836 4823.05,2822 ccw(c4830.05,2822) 4830.05,2815 4863.9,2815 cw(c4863.9,2808) 4870.9,2808 4870.9,2794 cw(c4863.9,2794) 4863.9,2787 4830.05,2787 ccw(c4830.05,2780) 4823.05,2780 4823.05,2766 ccw(c4830.05,2766) 4830.05,2759 4863.9,2759 cw(c4863.9,2752) 4870.9,2752 4870.9,2738 cw(c4863.9,2738) 4863.9,2731 4830.05,2731 ccw(c4830.05,2724) 4823.05,2724 4823.05,2710 ccw(c4830.05,2710) 4830.05,2703 4863.9,2703 cw(c4863.9,2696) 4870.9,2696 4870.9,2682 cw(c4863.9,2682) 4863.9,2675 4830.05,2675 ccw(c4830.05,2668) 4823.05,2668 4823.05,2654 ccw(c4830.05,2654) 4830.05,2647 4863.9,2647 cw(c4863.9,2640) 4870.9,2640 4870.9,2626 cw(c4863.9,2626) 4863.9,2619 4830.05,2619 ccw(c4830.05,2612) 4823.05,2612 4823.05,2598 ccw(c4830.05,2598) 4830.05,2591 4863.9,2591 cw(c4863.9,2584) 4870.9,2584 4870.9,2570 cw(c4863.9,2570) 4863.9,2563 4830.05,2563 ccw(c4830.05,2556) 4823.05,2556 4823.05,2542 ccw(c4830.05,2542) 4830.05,2535 4863.9,2535 cw(c4863.9,2528) 4870.9,2528 4870.9,2514 cw(c4863.9,2514) 4863.9,2507 4830.05,2507 ccw(c4830.05,2500) 4823.05,2500 4823.05,2486 ccw(c4830.05,2486) 4830.05,2479 4863.9,2479 cw(c4863.9,2472) 4870.9,2472 4870.9,2458 cw(c4863.9,2458) 4863.9,2451 4830.05,2451 ccw(c4830.05,2444) 4823.05,2444 4823.05,2430 ccw(c4830.05,2430) 4830.05,2423 4863.9,2423 cw(c4863.9,2416) 4870.9,2416 4870.9,2402 cw(c4863.9,2402) 4863.9,2395 4822.49,2395 ccw(c4822.49,2388) 4815.49,2388 4815.49,2374 ccw(c4822.49,2374) 4822.49,2367 4830.82,2367 cw(c4830.82,2359) 4838.82,2359 4838.82,2355 4838.82,2111.18 4949.15,2000.85 4949.15,1800.85 5014.42,1735.58 FPC1.16@5014.42,1698.97
D12: FPC1.15 M1.24 | length 3200
  Top Layer w8: M1.24@4925,3975.79 4925,3800 4899.34,3774.34 4899.34,3680 4899.34,3676 4899.34,3001 ccw(c4907.34,3001) 4907.34,2993 4909.94,2993 cw(c4909.94,2986) 4916.94,2986 4916.94,2972 cw(c4909.94,2972) 4909.94,2965 4888.99,2965 ccw(c4888.99,2958) 4881.99,2958 4881.99,2944 ccw(c4888.99,2944) 4888.99,2937 4926.49,2937 cw(c4926.49,2930) 4933.49,2930 4933.49,2916 cw(c4926.49,2916) 4926.49,2909 4888.99,2909 ccw(c4888.99,2902) 4881.99,2902 4881.99,2888 ccw(c4888.99,2888) 4888.99,2881 4926.49,2881 cw(c4926.49,2874) 4933.49,2874 4933.49,2860 cw(c4926.49,2860) 4926.49,2853 4893.7,2853 ccw(c4893.7,2846) 4886.7,2846 4886.7,2832 ccw(c4893.7,2832) 4893.7,2825 4926.49,2825 cw(c4926.49,2818) 4933.49,2818 4933.49,2804 cw(c4926.49,2804) 4926.49,2797 4893.7,2797 ccw(c4893.7,2790) 4886.7,2790 4886.7,2776 ccw(c4893.7,2776) 4893.7,2769 4926.49,2769 cw(c4926.49,2762) 4933.49,2762 4933.49,2748 cw(c4926.49,2748) 4926.49,2741 4893.7,2741 ccw(c4893.7,2734) 4886.7,2734 4886.7,2720 ccw(c4893.7,2720) 4893.7,2713 4926.49,2713 cw(c4926.49,2706) 4933.49,2706 4933.49,2692 cw(c4926.49,2692) 4926.49,2685 4893.7,2685 ccw(c4893.7,2678) 4886.7,2678 4886.7,2664 ccw(c4893.7,2664) 4893.7,2657 4926.49,2657 cw(c4926.49,2650) 4933.49,2650 4933.49,2636 cw(c4926.49,2636) 4926.49,2629 4893.7,2629 ccw(c4893.7,2622) 4886.7,2622 4886.7,2608 ccw(c4893.7,2608) 4893.7,2601 4926.49,2601 cw(c4926.49,2594) 4933.49,2594 4933.49,2580 cw(c4926.49,2580) 4926.49,2573 4893.7,2573 ccw(c4893.7,2566) 4886.7,2566 4886.7,2552 ccw(c4893.7,2552) 4893.7,2545 4926.49,2545 cw(c4926.49,2538) 4933.49,2538 4933.49,2524 cw(c4926.49,2524) 4926.49,2517 4893.7,2517 ccw(c4893.7,2510) 4886.7,2510 4886.7,2496 ccw(c4893.7,2496) 4893.7,2489 4926.49,2489 cw(c4926.49,2482) 4933.49,2482 4933.49,2468 cw(c4926.49,2468) 4926.49,2461 4893.7,2461 ccw(c4893.7,2454) 4886.7,2454 4886.7,2440 ccw(c4893.7,2440) 4893.7,2433 4926.49,2433 cw(c4926.49,2426) 4933.49,2426 4933.49,2412 cw(c4926.49,2412) 4926.49,2405 4907.34,2405 ccw(c4907.34,2397) 4899.34,2397 4899.34,2369 4899.34,2365 4899.34,2088.16 4978.16,2009.34 4978.16,1799.09 5034.1,1743.15 FPC1.15@5034.1,1698.97